# Altium PCB Main_Block.PcbDoc (part 2 of 3)
Units mil, origin at the board's own origin, x right, y up, seen from the top; angles counter-clockwise.
Board outline 1101.34 x 1573.78 mil, 8 copper layers (Top Layer - Signal, L2 - GND, L3-Signal, Layer 3 - Signal, L5 PWR, L6-Signal, L7-GND, Bottom Layer - Signal), stack 62.48 mil thick; 156 components, 137 nets, 799 pads, 431 vias.
Unrouted connection lines stored in the file: 382.
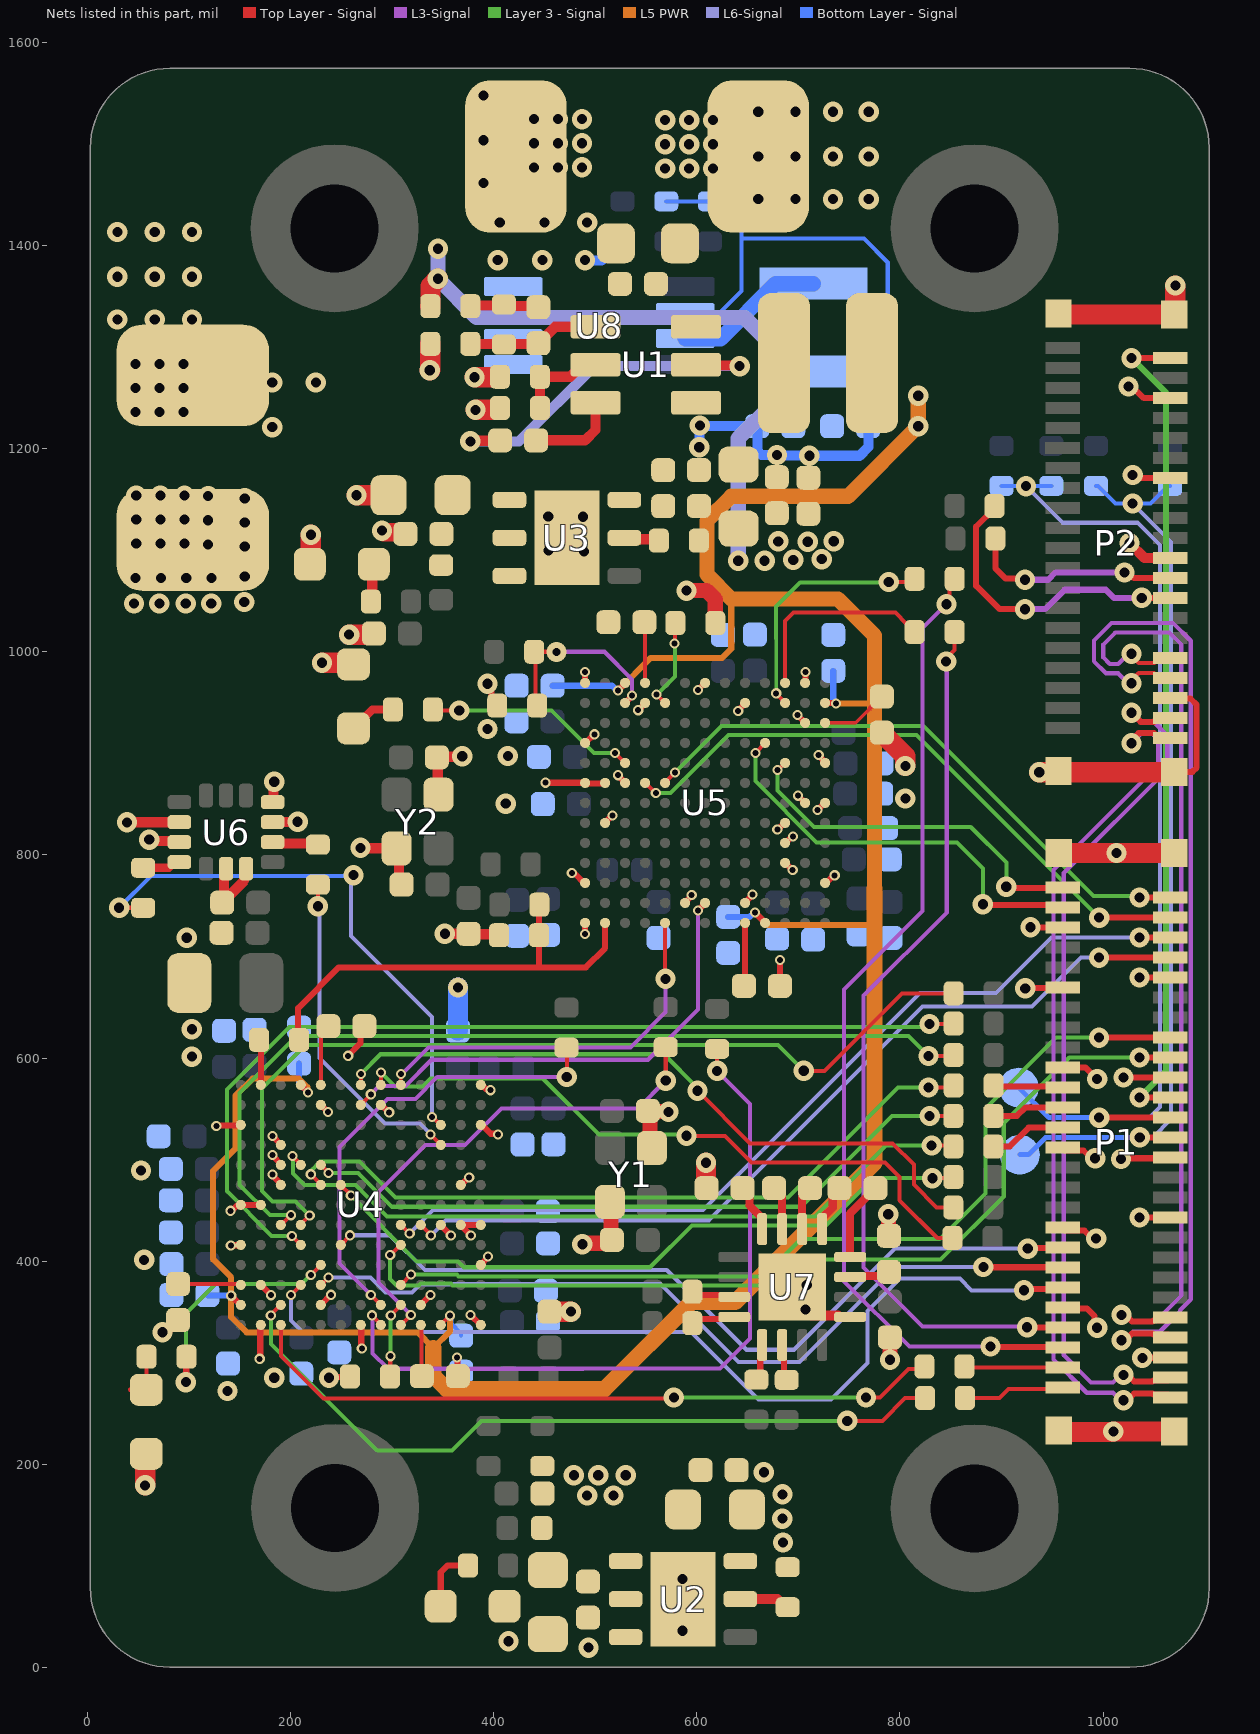
[diagram p8: the nets of this part, all layers, seen from the top]

## Via types
v1: diameter 20, hole 10, Top Layer - Signal to Bottom Layer - Signal, tented both sides, 285 vias
v2: diameter 10, hole 5.91, Top Layer - Signal to Bottom Layer - Signal, tented both sides, 145 vias
v3: diameter 19.68, hole 7.87, Top Layer - Signal to Bottom Layer - Signal, tented both sides, 1 vias

## Nets (pads, with @x,y where several pads share a name; then routed paths per layer and width w, separated by ;. In a path a pad name is that pad's centre, name@x,y a point inside that pad or via, vN(x,y) a via of type N, cw(c..) or ccw(c..) an arc to the next point about the centre after c; other vN are vias at no path point)
1V8: C21.1 C31.1 C38.1 C48.1 C62.1 C65.1 C78.2 C79.2 L2.2 R49.2 R50.2 U4.A3 U4.B13 U4.N10 U5.A3 U5.B13 U5.N10 U8.6 | length 3257.4
  Top Layer - Signal w4: U4.A3@347.4,336.68 v2(357.24,346.53)
  Top Layer - Signal w6: v2(141.77,366.16) U4.B13@151.62,356.31 ; U4.N10@210.3,573.68 210.3,573.55 217.49,566.37 v2(217.49,566.24) ; v2(522.53,961.81) 522.53,962.08 529.54,969.1 U5.A3@529.54,969.37 ; v2(657.5,743.29) 657.5,742.99 U5.N10@667.34,733.15 ; U5.B13@726.4,949.68 726.68,949.4 736.9,949.4 v2(737.19,949.11)
  L5 PWR w6: v2(217.49,566.24) 216.72,567.01 216.72,571.4 208.31,579.81 162.81,579.81 146,563 146,511 124,489 124,402 141.77,384.23 v2(141.77,366.16) 141.77,345.23 157,330 325.42,330 340.71,314.71 357.24,331.24 v2(357.24,346.53) ; v2(522.53,961.81) 554.72,994 625,994 634,1003 634,1052 ; v2(657.5,743.29) 669.79,731 774.62,731 775,730.62 ; v2(737.19,949.11) 774.9,949.11 775,949
  L5 PWR w15: 775,767 775,949 775,1016 739,1052 634,1052 610,1076 610,1129 634,1153 749,1153 v1(818,1222) v1(818,1252)
  L5 PWR w16: 340.71,314.71 340.71,287.29 354,274 509,274 595,360 638,360 775,497 775,730.62 775,767
  Bottom Layer - Signal w4: v2(357.24,346.53) 358.39,345.38 358.39,338.61 368.19,328.81 C21.1@368.19,326.83 ; R50.2@570,1443.37 630.63,1443.37 644,1430 644,1406.57 ; U8.6@588.65,1333.8 588.85,1334 623,1334 644,1355 644,1406.57 ; 788,1287 788,1383 764.43,1406.57 644,1406.57
  Bottom Layer - Signal w6: C31.1@118.4,366.93 118.78,366.54 141.39,366.54 v2(141.77,366.16) ; C38.1@208.67,594.61 208.67,575.05 v2(217.49,566.24) ; C65.1@458.21,966.55 516.7,966.55 521.44,961.81 v2(522.53,961.81) ; C48.1@631,739 652.12,739 656.41,743.29 v2(657.5,743.29) ; C62.1@734.4,981.18 734.4,952.98 737.19,950.19 v2(737.19,949.11)
12V: C2.1 C3.1 pad.2@104,1110 pad.2@660.6,1487.48 R1.1 U1.3 | length 26
  Top Layer - Signal w20: v1(382.19,1238.11) R1.1@404.59,1238.11 ; R1.1@404.62,1238.14 406.28,1238.14 406.43,1238.3 R1.1@406.43,1239.95
  other v1: 46.09,1047.48 71.09,1047.48 97.09,1047.48 122.09,1047.48 154.69,1048.94 47.58,1072.48 72.58,1072.48 97.5,1072.48 122.5,1072.48 155.09,1073.94 155.09,1103.48 48.35,1106.48 72.09,1106.48 95.84,1106.48 119.09,1105.73 155.09,1127.23 119.09,1129.48 48.35,1130.09 72.09,1130.09 95.84,1130.09 155.09,1150.97 119.09,1153.23 48.35,1153.7 72.09,1153.7 95.84,1153.7 660.6,1445.48 697.35,1445.48 734.09,1445.48 769.35,1445.48 568.87,1475.73 592.48,1475.73 616.09,1475.73 660.6,1487.48 697.35,1487.48 734.09,1487.48 769.35,1487.48 568.87,1499.48 592.48,1499.48 616.09,1499.48 568.87,1523.23 592.48,1523.23 616.09,1523.23 660.6,1531.48 697.35,1531.48 734.09,1531.48 769.35,1531.48
+5V_SYS: C4.1 C5.1 C7.1 C8.1 C11.1 C12.1 C77.2 L1.2 R2.1 R6.2 R9.2 U2.6 U3.6 U8.2 U8.3 | length 639.9
  Top Layer - Signal w20: R2.1@337.82,1340.11 337.98,1340.27 337.98,1359.9 v1(345.19,1367.11)
  L6-Signal w15: v1(345.36,1396.64) 345.27,1396.56 345.27,1367.19 v1(345.19,1367.11) 383.3,1329 647,1329 672,1304 672,1241 640.79,1209.79 v1(640.79,1089.59)
  other v1: 684.89,123.28 684.25,146.76 684.38,170.69 666.06,192.35 666.84,1089.59 694.97,1090.42 722.99,1091.15 709.24,1108.2 680.29,1108.62 734.88,1108.82
AUX1: P1.27 R25.1 R52.1 TP1.TP | length 902.7
  Top Layer - Signal w6: v1(1036,522) 1036.08,521.92 1066.02,521.92 P1.27@1066.1,521.84
  L6-Signal w4: v1(1029,1146) 1067,1108 1067,540 1049,522 v1(1036,522)
  Bottom Layer - Signal w4: R52.1@993,1163.31 994.97,1163.31 1012.28,1146 v1(1029,1146) 1046.72,1146 1064.03,1163.31 R25.1@1066,1163.31
  Bottom Layer - Signal w5: TP1.TP@918,505 926.45,505 943.45,522 v1(1036,522)
AUX2: P1.29 R26.1 R53.1 TP2.TP | length 984
  Top Layer - Signal w6: v1@996.04,541.5 P1.29@1066.1,541.52
  L6-Signal w4: v1(924,1163) 960,1127 1034,1127 1056,1105 1056,552 1045.49,541.49 v1(996.02,541.49)
  Bottom Layer - Signal w4: R53.1@900,1163.31 900.16,1163.16 923.84,1163.16 v1(924,1163) 924.16,1163.16 948.84,1163.16 R26.1@949,1163.31
  Bottom Layer - Signal w5: TP2.TP@917,571 946.51,541.49 v1(996.02,541.49)
CAM_TRIGGER: P1.31 P2.39 | length 821.2
  Top Layer - Signal w6: v1(1028,1289) P2.39@1066,1289 ; v1(1035.72,561.2) P1.31@1066.1,561.21
  Layer 3 - Signal w6: v1(1028,1289) 1062,1255 1062,587.48 v1(1035.72,561.2)
Elbow_SCL_IMU1_H: P1.51 U5.F5 | length 590.8
  Top Layer - Signal w4: U5.F5@568.91,870.94 568.91,871.24 578.64,880.97 v2(578.64,881.26)
  Top Layer - Signal w6: v1(1035.72,758.06) P1.51@1066.1,758.07
  Layer 3 - Signal w4: v2(578.64,881.26) 624.44,927.07 770.28,927.07 823.23,927.07 990.72,759.58 1034.2,759.58 v1(1035.72,758.06)
Elbow_SCL_MAG_H: P1.47 U4.F5 | length 881.5
  Top Layer - Signal w4: U4.F5@308.73,435.89 308.88,435.89 317.33,427.44 v2(317.49,427.44)
  Top Layer - Signal w6: v1(1035.72,718.69) P1.47@1066.1,718.7
  L6-Signal w4: v2(317.49,427.44) 340.53,450.48 606.09,450.48 819.59,663.98 894.58,663.98 949.3,718.69 v1(1035.72,718.69)
Elbow_SDA_IMU1_H: P1.49 U5.F4 | length 619.1
  Top Layer - Signal w4: U5.F4@549.23,870.94 549.53,870.94 559.37,861.1 v2(559.67,861.1)
  Top Layer - Signal w6: v1(996.02,738.35) 996.06,738.39 P1.49@1066.1,738.39 P1.49@1066.1,738.39
  Layer 3 - Signal w4: v2(559.67,861.1) 574.18,861.1 631.15,918.07 770.28,918.07 816.3,918.07 v1(996.02,738.35)
Elbow_SDA_MAG_H: P1.45 U4.F4 | length 855.8
  Top Layer - Signal w4: U4.F4@328.41,435.89 328.41,435.59 338.25,425.74 v2(338.25,425.44)
  Top Layer - Signal w6: v1(995.98,698.94) 996.02,698.98 P1.45@1066.1,699.02 P1.45@1066.1,699.02
  L6-Signal w4: v2(338.25,425.44) 353.29,440.48 612,440.48 802.08,630.55 802.08,630.7 822.06,650.68 930.12,650.68 978.38,698.94 v1(995.98,698.94)
Elbow_TIM4_CH1: P1.28 R18.2 | length 76
  Top Layer - Signal w6: R18.2@891.88,513.11 908.19,513.11 926.76,531.68 P1.28@960.19,531.68
Elbow_TIM4_CH2: P1.30 R19.2 | length 71.7
  Top Layer - Signal w6: R19.2@891.88,543.11 915.19,543.11 923.45,551.37 P1.30@960.19,551.37
Elbow_TIM4_CH3: P1.32 R20.2 | length 68.9
  Top Layer - Signal w6: R20.2@892.19,573.11 893.22,572.08 959.16,572.08 P1.32@960.19,571.05
ETHE_RX_N: P1.9 P2.9 | length 943.9
  Top Layer - Signal w4.2: v1(1028,998) 1028,996 1035,989 1050.25,989 1054.98,993.72 P2.9@1066,993.72
  Top Layer - Signal w6: v1(1018.09,347.33) 1021.88,347.33 1028.38,340.83 1048.65,340.83 1049.59,341.77 1063.19,341.77 P1.9@1066.1,344.67
  L3-Signal w4.2: v1(1018.09,347.33) 1022.08,347.33 1028.46,340.95 1051.57,340.95 1077,366.39 1077,1007 1065,1019 1012.01,1019 1000.2,1007.19 1000.2,994.36 1006.56,988 1014.95,988 1024.95,998 v1(1028,998)
ETHE_RX_P: P1.7 P2.7 | length 1008
  Top Layer - Signal w4.2: v1(1028,969) 1028,972 1035,979 1050.02,979 1054.98,974.04 P2.7@1066,974.04
  Top Layer - Signal w6: v1(1018.09,322.33) 1021.88,322.33 1028.38,328.83 1048.65,328.83 1049.59,327.89 1063.19,327.89 P1.7@1066.1,324.99
  L3-Signal w4.2: v1(1018.09,322.33) 1020.87,322.33 1029.29,330.75 1055.79,330.75 1075.57,350.53 1075.57,351.94 1086.2,362.58 1086.2,1010.81 1068.81,1028.2 1008.2,1028.2 998,1018 997.94,1018 991,1011.06 991,990.55 1002.75,978.8 1014.75,978.8 1024.55,969 v1(1028,969)
ETHE_TX_N: P1.3 P2.3 | length 863.2
  Top Layer - Signal w6: v1(1020.09,288.28) 1023.88,288.28 1030.38,281.78 1048.65,281.78 1049.59,282.71 1063.19,282.71 P1.3@1066.1,285.62 ; v1(1028,940) 1037,931 1050,931 1050.76,931.76 1063.09,931.76 P2.3@1066,934.67
  L3-Signal w4.2: v1(1020.09,288.28) 1017.13,288.28 1009.73,280.88 988.12,280.88 961.29,307.71 961.29,782.22 1063.2,884.13 1063.2,917.74 1050.74,930.2 1037.8,930.2 v1(1028,940)
ETHE_TX_P: P1.1 P2.1 | length 868.5
  Top Layer - Signal w6: v1(1020.09,263.28) 1023.88,263.28 1030.38,269.78 1048.65,269.78 1049.59,268.84 1063.19,268.84 P1.1@1066.1,265.93 ; v1(1028,910) 1028,913 1035,920 1049.96,920 1054.98,914.98 P2.1@1066,914.98
  L3-Signal w4.2: v1(1020.09,263.28) 1017.13,263.28 1009.73,270.68 983.9,270.68 951.09,303.48 951.09,785.03 1054,887.94 1054,913.93 1046.93,921 1039,921 v1(1028,910)
GND: C2.2 C3.2 C4.2 C5.2 C7.2 C8.2 C9.2 C10.2 C11.2 C12.2 C13.2 C14.2 C15.2 C16.2 C17.2 C18.2 C19.1 C20.2 C21.2 C22.2 C23.2 C24.1 C25.2 C26.2 C27.2 C28.2 C29.2 C30.2 C31.2 C32.2 C33.2 C34.2 C35.2 C36.2 C37.2 C38.2 C39.2 C40.2 C41.2 C42.2 C43.1 C44.1 C45.1 C46.1 C47.2 C48.2 C49.2 C50.2 C51.1 C52.2 C53.2 C54.2 C55.2 C56.2 C57.2 C58.2 C59.2 C60.2 C61.2 C62.2 C63.2 C64.2 C65.2 C66.2 C67.2 C68.2 C69.2 C70.2 C71.2 C72.2 C75.2 C76.2 C77.1 C78.1 C79.1 D1.1 D2.1 D3.1 D4.1 P1.0 P1.5 P1.10 P1.18 P1.19 P1.25 P1.26 P1.33 P1.34 P1.42 P1.43 P1.48 P2.0 P2.5 P2.19 P2.27 P2.35 pad.2@104,1272 pad.2@422,1487.48 R3.2 R5.2 R10.1 R22.1 R40.1 R46.1 R48.1 R51.1 U1.1 U2.3 U2.7 U3.3 U3.7 U4.A1 U4.A7 U4.A12 U4.B4 U4.B9 U4.C12 U4.D1 U4.E13 U4.F1 U4.F2 U4.F3 U4.G12 U4.G13 U4.H2 U4.H11 U4.J11 U4.K11 U4.L1 U4.L13 U4.M6 U4.M9 U4.N1 U5.A1 U5.A7 U5.A12 U5.B4 U5.B9 U5.C12 U5.D1 U5.E13 U5.F1 U5.F2 U5.F3 U5.G12 U5.G13 U5.H2 U5.H11 U5.J11 U5.K11 U5.L1 U5.L13 U5.M6 U5.M9 U5.N1 U6.2 U6.3 U6.6 U6.7 U6.10 U6.11 U7.13 U7.17 U8.1 U8.4 Y1.2 Y1.4 Y2.2 Y2.4 | length 3256.2
  Top Layer - Signal w4: v2@182.56,503.89 v2(182.56,504.79) ; v2@182.56,523.08 v2(182.56,523.48) ; U4.J11@190.62,494.94 U4.J11@190.62,495.84 ; U4.K11@190.62,514.63 U4.K11@190.62,515.03 ; U4.M9@229.99,554 U4.M9@230.38,554 ; U4.A7@269.27,337.38 U4.A7@269.36,337.46 ; U4.F3@348.1,435.59 U4.F3@348.1,435.89 ; v2(357.94,425.44) v2@357.94,425.74 ; v2(377.21,347.13) v2@377.51,347.13 ; v2(377.62,425.44) v2@377.62,425.74 ; U4.A1@387.17,337.46 U4.A1@387.47,337.46 ; U5.H11@687.03,831.05 U5.H11@687.03,831.57
  Top Layer - Signal w6: v2(127.15,533.37) 127.62,533.84 150.77,533.84 U4.L13@151.25,534.31 ; v2(141.18,449.74) 142.26,449.74 147.33,454.81 150.23,454.81 150.99,455.57 U4.G12@170.93,455.57 ; v2(141.37,415.56) 141.69,415.88 150.93,415.88 U4.E13@151.25,416.2 ; v2(169.86,304.14) 170.39,304.68 170.39,336.93 U4.A12@170.93,337.46 ; U4.C12@170.93,376.83 v2(181.07,366.69) ; v2(182.56,485.39) 182.56,484.35 190.62,476.3 U4.H11@190.62,475.26 ; v2@182.56,503.89 U4.J11@190.62,495.84 ; v2@182.56,523.08 U4.K11@190.62,515.03 ; U4.B9@230.19,357.11 230.19,357.3 v2(240.03,367.1) v2(240.03,367.1) ; U4.M9@230.38,554 230.38,553.65 v2@237.12,546.91 ; v1(238.09,285.48) 238.66,286.04 258.24,286.04 R10.1@258.8,286.6 ; v2@256.95,602.61 268.87,614.53 268.87,627.54 C18.2@272.81,631.48 ; U4.A7@269.27,337.38 269.83,336.82 269.83,314.55 v2(270.31,314.08) ; U4.M6@289.62,553.11 290.45,553.11 296.82,546.74 v2(297.34,546.74) ; U4.B4@328.41,357.15 328.41,357.24 337.82,366.65 v2(337.82,366.75) ; U4.F3@348.1,435.59 v2@357.94,425.74 ; v2(364.09,305.48) 364.5,305.07 364.5,287.52 C16.2@364.91,287.11 ; U4.H2@367.78,475.26 368.23,475.26 375.62,482.66 v2(376.07,482.66) ; v2@376.09,482.48 v2(376.07,482.66) ; v2@377.51,347.13 U4.A1@387.17,337.46 ; v2@377.62,425.74 367.78,435.59 368.08,435.89 U4.F1@387.47,435.89 ; U4.L1@387.47,534.31 388.55,534.31 397.28,525.58 403.6,525.58 v2(404.36,524.81) ; U4.N1@387.47,573.68 388.55,573.68 392.99,569.25 396.33,569.25 v2(397.09,568.48) ; U4.D1@387.71,395.93 387.71,397.32 394.52,404.13 v2(394.52,404.69) ; v1(394.09,968.48) 394.09,964.69 397.97,960.81 397.97,952.66 R46.1@403.63,947 ; v2(451.19,871.11) 451.27,871.03 490.09,871.03 U5.F1@490.17,870.94 490.81,870.31 509.23,870.31 U5.F2@509.86,870.94 ; C24.1@455.19,350.54 455.25,350.48 C24.1@463.47,350.48 ; v2(477.03,782.18) 477.79,781.42 480.19,781.42 488.87,772.74 U5.L1@490.19,772.74 ; U5.D1@489.54,910.31 490.53,910.31 498.97,918.75 v2(499.32,918.75) ; v2(490.19,722.11) U5.N1@490.17,733.15 ; U5.A1@490.17,969.37 v2(490.19,980.11) ; U5.H2@509.6,831.57 v2(517.01,838.99) ; v2(522.38,878.46) 522.38,878.28 529.54,871.12 U5.F3@529.54,870.94 ; v2(542.37,942.43) 542.37,942.62 549.23,949.49 U5.B4@549.23,949.68 ; U5.M6@588.53,752.87 588.53,753.45 595.07,759.99 v2(595.07,760.67) ; v2(601.1,962.48) 601.24,962.48 608.14,969.37 U5.A7@608.28,969.37 ; v2(640.81,941.63) 640.81,942.23 647.65,949.08 U5.B9@647.65,949.68 ; U5.M9@647.02,752.83 647.14,752.83 654.94,760.63 v2(654.94,761.15) ; v2(679.29,825.03) 679.88,825.03 685.9,831.05 U5.H11@687.03,831.05 ; C45.1@681.91,671.11 681.91,696.29 v2(682.09,696.48) ; U5.K11@687.03,792.2 687.17,792.2 694.33,785.05 v2(694.47,785.05) ; U5.J11@687.03,811.89 687.72,811.89 694.13,818.29 v2(694.83,818.29) ; v2(699.19,937.72) 699.19,937.62 706.71,930.1 U5.C12@706.71,930 ; v2@699.57,858.35 U5.G12@706.71,851.26 ; U5.A12@706.71,969.37 706.95,969.61 706.95,979.87 v2(707.19,980.11) ; v2(718.91,844.41) 719.23,844.41 726.07,851.26 U5.G13@726.4,851.26 ; v2(720.08,898.38) 720.08,897.66 726.4,891.35 U5.E13@726.4,890.63 ; U5.L13@726.66,771.87 726.73,771.87 734.86,780 v2(735.84,780) ; v1(923.3,668.65) 923.72,669.07 959.77,669.07 P1.42@960.19,669.49 ; v1(928.55,728.91) 928.74,728.73 960.01,728.73 P1.48@960.19,728.55 ; P1.10@960.19,354.52 961.23,353.48 984.19,353.48 991.43,346.24 991.43,337.3 v1(994.11,334.62) ; P1.18@960.19,433.26 963.1,430.35 981.44,430.35 989.31,422.48 v1(993.09,422.48) ; P1.26@960.19,512 963.1,509.09 980.7,509.09 988.31,501.48 v1(992.09,501.48) ; P1.34@960.19,590.74 982.84,590.74 v1(994.09,579.48) ; v1(1017.51,500.77) 1018.2,501.46 1065.4,501.46 P1.25@1066.1,502.15 ; v1(1019.96,580.91) P1.33@1066.1,580.89 ; v1(1025,1261) 1028.7,1261 1040.07,1249.63 P2.35@1066,1249.63 ; v1(1029,1174) 1032.79,1174 1035.9,1170.89 P2.27@1066,1170.89 ; v1(1035.72,443.09) P1.19@1066.1,443.1 ; v1(1035.72,679.32) P1.43@1066.1,679.33 ; v1(1038.65,305.03) 1038.78,305.17 1065.96,305.17 P1.5@1066.1,305.3 ; P2.5@1066,954.35 1066.35,954 1086,954 1092,948 1092,886 1087.83,881.83 P2.0@1070.09,881.83 P2.0@1069.75,881.48
  Top Layer - Signal w10: v1(39.19,832.11) 39.31,832.23 90.72,832.23 U6.2@90.84,832.35 ; v1(61.19,815.11) 62.41,813.89 89.62,813.89 U6.3@90.84,812.66 ; v1(74.16,330.29) 76.08,332.2 79.05,332.2 89.11,342.27 C17.2@89.6,342.27 ; C76.2@132.95,753.15 C76.2@134.83,755.03 ; U6.6@136.71,786.48 134.83,784.6 C76.2@134.83,755.03 ; U6.7@156.4,786.48 154.51,784.59 154.51,774.7 C76.2@134.83,755.03 ; U6.10@182.58,832.35 182.73,832.51 207.03,832.51 v1(207.19,832.66) ; U6.11@182.58,852.03 183.38,852.84 183.38,871.3 v1(184.19,872.11) ; v1(269.09,806.98) 269.42,806.64 304.28,806.64 307.09,803.83 307.09,773.36 C68.2@309.57,770.88 ; Y2.2@345.95,859.46 345.07,860.34 345.07,895.23 C54.2@344.19,896.11 344.69,896.61 368.69,896.61 v1(369.19,897.11) ; v1@352.13,722.45 C51.1@375.43,722.45 ; C51.1@375.47,722.41 375.93,721.95 400.94,721.95 R40.1@401.41,721.48 ; v1(708.26,376.77) 706.9,375.41 v1(706.9,352.55) 712.79,346.65 738.81,346.65 740.27,345.19 U7.13@750.94,345.19 ; v1(1026,1107) 1040.85,1092.15 P2.19@1066,1092.15
  Top Layer - Signal w15: v1(487.44,416.8) 488.4,417.75 512.16,417.75 515.5,421.09 515.5,457.56 Y1.2@514.52,458.53 ; C41.2@551.91,548.11 C41.2@552.41,547.61 ; Y1.4@555.86,511.68 553.88,513.66 553.88,546.13 C41.2@552.41,547.61 ; v1(572.19,547.11) 571.69,547.61 C41.2@552.41,547.61 ; v1(589.98,1060.17) 609.52,1060.17 618.31,1051.38 R22.1@618.31,1028.23 ; v1(788.46,446.38) 788.85,446 788.85,425.58 C71.2@789.23,425.2 ; v1(790.19,303.11) C72.2@790.15,325.13
  Top Layer - Signal w18: v1(290.2,1119.25) 291.83,1117.63 311.66,1117.63 C13.2@313.28,1116
  Top Layer - Signal w20: v1(57.09,179.48) 57.09,209.52 D3.1@58.19,210.62 ; D2.1@219.15,1086.18 220.19,1087.23 v1(220.19,1115.11) ; v1(231.19,989.11) 260.68,989.11 D4.1@262.19,987.6 ; v1(257.89,1016.84) 281.11,1016.84 C57.2@282.24,1017.97 ; v1(265.19,1154.11) C14.2@296.69,1154.11 ; v1(337.19,1277.11) 337.66,1277.58 337.66,1302.95 R5.2@337.82,1303.11 ; v1(381.19,1270.11) 406.1,1270.11 406.25,1270.27 R3.2@406.25,1270.66 ; C24.1@463.47,350.48 v1(476.09,350.48) ; v1(609.19,497.11) 609.19,472.68 C75.2@609.76,472.11 ; C44.1@782.19,920.39 805.33,897.25 v1(805.33,887.48) ; v1(937.09,881.48) P2.0@1069.75,881.48 ; P2.0@956.09,1332.83 956.92,1332 P2.0@1070,1332 1071.09,1333.09 v1(1071.09,1360.48) ; P1.0@956.19,801.89 v1(1013.14,801.89) P1.0@1070.1,801.89 ; P1.0@957.58,232.06 1009.68,232.06 v1(1010.09,232.48) 1069.89,232.48 P1.0@1070.19,232.78
  Bottom Layer - Signal w10: v1(490.09,1385.48) 490.57,1385 506.03,1385 525.03,1404 R51.1@527,1404 ; v1(602.53,1201.32) 602.8,1201.59 602.8,1222.34 v1(603.07,1222.61) 603.38,1222.3 659.26,1222.3 C78.1@659.57,1222 ; C78.1@659.94,1221.62 659.94,1197.43 663.71,1193.67 v1(679.03,1193.67) ; v1@678.88,1193.44 v1@679.03,1193.29 ; v1@679.4,1193.67 679.78,1193.29 v1@710.88,1193.29 ; v1(710.88,1192.92) 760.29,1192.92 769.09,1201.72 C79.1@769.09,1221.62
  Bottom Layer - Signal w20: C28.2@364.84,627.17 364.97,627.3 364.97,669.35 v1(365.09,669.48)
  other v1: 493.46,19.81 414.67,26.01 586.09,36.48 586.09,87.48 492.09,169.48 518.09,169.48 479.09,189.48 503.09,189.48 530.09,189.48 138.09,272.48 184.09,285.48 56.09,401.48 53.09,489.48 103.09,601.48 103.09,628.48 98.09,718.48 352.09,722.48 412.09,850.48 805.33,855.48 414.09,897.48 394.12,924.06 489.11,1098.71 454.11,1099.64 453.8,1133.24 488.17,1132.93 182.25,1221.09 47.5,1236.09 71.25,1236.09 95,1236.09 47.5,1259.7 71.25,1259.7 95,1259.7 182.25,1265.09 225.09,1265.09 47.5,1283.31 71.25,1283.31 95,1283.31 29.76,1327.09 66.5,1327.09 103.25,1327.09 29.76,1369.09 66.5,1369.09 103.25,1369.09 404.09,1385.48 448.09,1385.48 29.76,1413.09 66.5,1413.09 103.25,1413.09 406.09,1422.48 450.09,1422.48 492.09,1422.48 390.09,1461.48 439.87,1476.73 463.48,1476.73 487.09,1476.73 439.87,1500.48 463.48,1500.48 487.09,1500.48 390.09,1503.48 439.87,1524.23 463.48,1524.23 487.09,1524.23 390.09,1547.48
  other v2: 237.17,546.91 256.95,602.35 699.52,858.35
GPIO_DR: R38.1 R39.1 R40.2 U5.N2 | length 444.7
  Top Layer - Signal w6: R38.1@208.69,618 207.58,619.11 207.58,649.21 247.62,689.26 444.69,689.26 ; R39.1@444.69,750.69 444.69,689.26 ; U5.N2@509.86,733.15 509.86,708.32 490.79,689.26 444.69,689.26
I2C1_SCL: P1.35 U4.E5 | length 945.1
  Top Layer - Signal w4: v2(298.28,406.36) 298.58,406.36 308.42,416.2 U4.E5@308.73,416.2
  Top Layer - Signal w6: v1(1035.72,600.57) P1.35@1066.1,600.58
  Layer 3 - Signal w4: v2(298.28,406.36) 298.28,382.72 304.58,376.42 326.39,376.42 327.98,378 358,378 359.81,376.19 672.81,376.19 698.57,401.96 840.1,401.96 902.19,464.05 902.19,536.11 966.65,600.57 v1(1035.72,600.57)
I2C1_SDA: P1.37 U4.C5 | length 908.5
  Top Layer - Signal w4: U4.C5@308.73,376.83 308.78,376.83 v2(318.92,386.92) v2(318.92,386.92)
  Top Layer - Signal w6: v1(995.98,620.19) v1(995.98,620.19) 1066.06,620.23 P1.37@1066.1,620.26
  Layer 3 - Signal w4: v2(318.92,386.92) 363.89,386.92 365.62,385.19 665.81,385.19 702.74,422.13 839.21,422.13 884.04,466.96 884.04,550.4 953.82,620.19 v1(995.98,620.19)
I2C3_SCL: P1.50 U5.D10 | length 416.2
  Top Layer - Signal w4: v2(657.8,900.18) 657.8,900.48 667.34,910.02 U5.D10@667.34,910.31
  Top Layer - Signal w6: v1(881.63,751.53) 882.45,750.7 957.72,750.7 P1.50@960.19,748.23
  Layer 3 - Signal w4: v2(657.8,900.18) 657.8,872.63 718.09,812.34 770.28,812.34 856.11,812.34 881.63,786.83 v1(881.63,751.53)
I2C3_SDA: P1.52 U5.E11 | length 365.1
  Top Layer - Signal w4: v2(679.66,883.71) 679.88,883.71 686.8,890.63 U5.E11@687.03,890.63
  Top Layer - Signal w6: v1(904.7,768.7) 906.07,767.33 959.6,767.33 P1.52@960.19,767.92
  Layer 3 - Signal w4: v2(679.66,883.71) 679.66,863.37 715.45,827.57 770.28,827.57 869.71,827.57 904.7,792.58 v1(904.7,768.7)
I2C4_SCL: U4.N5 U5.N5 | length 384.4
  Top Layer - Signal w3.5: U4.N5@308.73,573.68 308.77,573.73 308.77,584.36 v2(308.81,584.4)
  Top Layer - Signal w4: U5.N5@568.91,733.15 568.91,689.26 568.91,678.34 v1(569.24,678.02)
  L3-Signal w4: v2(308.81,584.4) 309.96,584.4 336.18,610.62 463.47,610.62 534.65,610.62 569.24,645.21 v1(569.24,678.02)
I2C4_SDA: U4.M7 U5.M7 | length 477.5
  Top Layer - Signal w4: U4.M7@270.14,555.08 279.2,564.14 v2(279.2,564.44)
  Top Layer - Signal w6: v2(601.36,745.43) U5.M7@608.44,752.52
  L3-Signal w4: v2(279.2,564.44) 287.48,572.72 313.36,572.72 339.08,598.44 463.47,598.44 552.05,598.44 601.36,647.74 601.36,689.26 v2(601.36,745.43)
IMU1_INT1: R24.2 U4.L3 | length 552.5
  Top Layer - Signal w4: v1(31.5,748.03) R24.2@55.12,748.03 ; v2(339.56,541.93) 340.02,541.93 348.44,533.51 U4.L3@348.6,533.51
  L6-Signal w4: v1(262.19,780.11) 259.65,777.57 259.65,720.32 339.56,640.41 339.56,607 v2(339.56,541.93)
  Bottom Layer - Signal w4: v1(31.5,748.03) 62.69,779.22 261.3,779.22 v1(262.19,780.11)
IMU1_INT2_FSYNC: R23.1 U4.K3 | length 326.2
  Top Layer - Signal w4: v1(227.09,749.48) R23.1@227.09,770.8 ; v2(338.1,524.92) 338.1,524.77 347.8,515.08 U4.K3@347.8,514.86
  L6-Signal w4: v1(227.09,749.48) 228.66,747.91 228.66,600.13 293.22,535.57 327.75,535.57 338.1,525.22 v2(338.1,524.92)
MCU1_Main_SWCLK: P1.4 R44.1 | length 97.2
  Top Layer - Signal w4: R44.1@863.78,293.48 865.76,295.46 P1.4@960.19,295.46
MCU1_Main_SWDIO: P1.2 R43.1 | length 100.4
  Top Layer - Signal w4: R43.1@864.09,265.48 898.09,265.48 906.8,274.18 958.6,274.18 P1.2@960.19,275.78
MCU2_Main_SWCLK: P1.8 R32.1 | length 883.8
  Top Layer - Signal w4: v1(845.47,990.43) 845.47,993.23 853.88,1001.64 R32.1@853.88,1019.45
  Top Layer - Signal w6: v1(925.19,335.11) 925.33,334.97 960.05,334.97 P1.8@960.19,334.83
  L3-Signal w4: v1(845.47,990.43) 846.09,989.81 846.09,743.48 764.09,661.48 764.09,393.97 822.17,335.9 924.4,335.9 v1(925.19,335.11)
MCU2_Main_SWDIO: P1.6 R31.1 | length 978.7
  Top Layer - Signal w4: v1(845.88,1046.81) 848.95,1049.87 848.95,1066.87 R31.1@853.88,1071.81
  Top Layer - Signal w6: v1(889.19,316.11) 889.67,315.63 959.71,315.63 P1.6@960.19,315.15
  L3-Signal w4: v1(845.88,1046.81) 822.33,1023.26 822.33,744.72 745.09,667.48 745.09,380.29 809.28,316.11 v1(889.19,316.11)
NetC1_1: C1.1 U1.6 | length 89.5
  Top Layer - Signal w10: C1.1@441.91,1208.11 490.19,1208.11 500.37,1218.29 U1.6@500.37,1245.11
NetC1_2: C1.2 L1.1 U1.2 | length 368.9
  Top Layer - Signal w10: v1(377.19,1207.11) 377.69,1207.61 405.97,1207.61 C1.2@406.47,1208.11 ; U1.2@599.19,1282.51 599.89,1281.81 641.49,1281.81 v1(642.19,1281.11)
  L6-Signal w10: v1(377.19,1207.11) 425.11,1207.11 499.11,1281.11 v1(642.19,1281.11)
NetC6_1: C6.1 R4.2 R5.1 U1.4 | length 130.7
  Top Layer - Signal w10: R5.1@377.19,1303.11 377.53,1302.77 409.85,1302.77 R4.2@410.19,1302.42 410.82,1303.05 443.56,1303.05 C6.1@444.19,1303.68 444.53,1303.68 460.77,1319.91 U1.4@500.37,1319.91
NetC6_2: C6.2 R2.2 R4.1 | length 68.8
  Top Layer - Signal w10: R2.2@377.19,1340.11 378.03,1340.95 409.35,1340.95 R4.1@410.19,1341.79 411.53,1340.45 442.85,1340.45 C6.2@444.19,1339.11
NetC9_1: C9.1 C10.1 FB3.1 U2.1 U2.2
NetC13_1: C13.1 C14.1 FB4.1 U3.1 U3.2
NetC16_1: C16.1 U4.A4 | length 50.8
  Top Layer - Signal w4: U4.A4@328.41,337.46 328.94,336.93 328.94,287.64 C16.1@329.47,287.11
NetC17_1: C17.1 U4.C13 | length 62
  Top Layer - Signal w4: C17.1@89.6,377.7 107.36,377.7 150.38,377.7 U4.C13@151.25,376.83
NetC18_1: C18.1 U4.N9 | length 60.9
  Top Layer - Signal w4: U4.N9@229.99,573.68 229.99,624.09 C18.1@237.38,631.48
NetC43_2: C43.2 U5.A4 | length 60
  Top Layer - Signal w4: C43.2@548.49,1029.05 549.23,1028.31 U5.A4@549.23,969.37 ; C43.2@554.91,1029.05 C43.2@554.91,1029.11
NetC44_2: C44.2 U5.C13 | length 66.5
  Top Layer - Signal w3.5: U5.C13@726.4,930 756.36,930 770.28,943.92
  Top Layer - Signal w4: 770.28,943.92 C44.2@782.19,955.83
NetC45_2: C45.2 U5.N9 | length 62.5
  Top Layer - Signal w6: C45.2@646.47,671.11 647.65,672.29 U5.N9@647.65,733.15
NetC71_1: C71.1 U7.15 | length 41.4
  Top Layer - Signal w8: U7.15@750.94,384.57 751.86,385.49 C71.1@786.01,385.49 ; C71.1@790.05,384.86 C71.1@794.23,389.05
NetC73_1: C73.1 U7.16 | length 78.2
  Top Layer - Signal w8: U7.16@750.94,404.26 750.94,447.14 C73.1@775.91,472.11
NetC73_2: C73.2 U7.1 | length 47.4
  Top Layer - Signal w8: U7.1@723.47,431.72 723.47,442.55 733.84,452.92 733.84,465.47 C73.2@740.47,472.11
NetC74_1: C74.1 U7.2 | length 43.6
  Top Layer - Signal w8: U7.2@703.78,431.72 703.78,463.24 711.62,471.08 C74.1@711.62,472.11
NetC74_2: C74.2 U7.3 | length 43.7
  Top Layer - Signal w8: C74.2@676.19,472.11 676.19,471.08 684.09,463.17 U7.3@684.09,431.72
NetC75_1: C75.1 U7.4 | length 48.3
  Top Layer - Signal w8: C75.1@645.19,472.11 651.83,465.47 651.83,455.13 664.4,442.55 U7.4@664.4,431.72
NetD1_2: D1.2 R7.1 | length 63
  Top Layer - Signal w6: D1.2@348.01,60.55 348.01,94.01 354.55,100.55 R7.1@374.81,100.55
NetD2_2: D2.2 R8.1 | length 42.6
  Top Layer - Signal w10: R8.1@278.97,1051.31 R8.1@280.58,1052.92 ; R8.1@279.22,1049.37 280.67,1050.83 280.67,1084.73 D2.2@282.12,1086.18 ; D2.2@280.58,1086.5 D2.2@282.19,1088.11
NetD3_2: D3.2 R17.1 | length 55
  Top Layer - Signal w4: 42.05,273.6 42.25,273.79 D3.2@58.19,273.79 ; D3.2@58.51,267.31 R17.1@58.51,306.11
NetD4_2: D4.2 R29.1 | length 46.3
  Top Layer - Signal w8: D4.2@262.19,924.62 280.68,943.11 R29.1@300.82,943.11
NetL2_1: L2.1 U8.7 | length 148.9
  Bottom Layer - Signal w15: U8.7@588.65,1308.2 588.85,1308 623.29,1308 677.6,1362.31 L2.1@715,1362.31
NetP1_12: P1.12 U4.C10 | length 915.8
  Top Layer - Signal w4: v2(200.61,366.88) 200.61,367.01 210.3,376.7 U4.C10@210.3,376.83
  Top Layer - Signal w6: v1(922.09,371.53) 923.43,372.86 958.85,372.86 P1.12@960.19,374.2
  L6-Signal w4: v2(200.61,366.88) 200.61,341.97 212.09,330.48 594.35,330.48 660.83,264 732,264 768,300 768,351 800,383 859,383 870.47,371.53 v1(922.09,371.53)
NetP1_14: P1.14 U4.C9 | length 813.4
  Top Layer - Signal w4: U4.C9@229.99,376.83 230.06,376.83 237.34,384.11 v2(237.41,384.11)
  Top Layer - Signal w6: v1(882.09,394.48) 882.39,394.18 959.89,394.18 P1.14@960.19,393.89
  L6-Signal w4: v2(237.41,384.11) 279.05,384.11 293.82,369.34 319.93,369.34 328.08,377.49 564.51,377.49 641,301 701,301 794.48,394.48 v1(882.09,394.48)
NetP1_16: P1.16 U4.E8 | length 803
  Top Layer - Signal w4: U4.E8@249.67,416.2 249.67,416.33 258.88,425.54 v2(258.88,425.67) ; P1.16@960.15,413.53 P1.16@960.19,413.57
  Top Layer - Signal w6: v1(925.85,412.56) 926.36,413.07 959.69,413.07 P1.16@960.15,413.53
  L6-Signal w4: v2@258.88,425.58 v2(258.88,425.67) 298.33,425.67 332.5,391.5 570.5,391.5 649,313 695.77,313 795.33,412.56 v1(925.85,412.56)
NetP2_15: P2.15 R41.2 | length 297.8
  Top Layer - Signal w6: R41.2@893.15,1143.41 893.15,1141.45 875,1123.3 875,1065 898.1,1041.9 v1(923.02,1041.9) ; v1(1038,1053) 1038.11,1052.89 1065.89,1052.89 P2.15@1066,1052.78
  L3-Signal w6: v1(923.02,1041.9) 942.9,1041.9 962,1061 1002.61,1061 1010.61,1053 v1(1038,1053)
NetP2_17: P2.17 R42.2 | length 211.3
  Top Layer - Signal w6: R42.2@893.94,1111.48 893.94,1082.06 904.02,1071.98 921.94,1071.98 v1(923.02,1070.9) ; v1(1021,1078) 1024.79,1078 1030.32,1072.46 P2.17@1066,1072.46
  L3-Signal w6: v1(923.02,1070.9) 945.9,1070.9 953,1078 v1(1021,1078)
NetR1_2: R1.2 R3.1 U1.5 | length 90.4
  Top Layer - Signal w10: R1.2@445.8,1239.95 445.71,1240.04 445.71,1270.57 R3.1@445.62,1270.66 475.53,1270.66 487.38,1282.51 U1.5@500.37,1282.51
NetR6_1: R6.1 U2.5 | length 49.8
  Top Layer - Signal w10: U2.5@643,67.55 679.53,67.55 687.53,59.55 R6.1@689.5,59.55
NetR9_1: R9.1 U3.5 | length 35.1
  Top Layer - Signal w10: U3.5@528.69,1112.11 530.04,1110.76 561.35,1110.76 R9.1@562.7,1109.4
NetR10_2: R10.2 U4.B5 | length 74.8
  Top Layer - Signal w4: R10.2@298.17,286.6 298.33,286.76 298.33,306.44 v2(298.49,306.6) ; v2(298.88,346.7) 298.88,347 308.73,356.85 U4.B5@308.73,357.15
  Layer 3 - Signal w4: v2@298.81,306.68 298.68,306.8 298.68,346.5 v2(298.88,346.7)
NetR11_1: R11.1 U4.N6 | length 662
  Top Layer - Signal w4: U4.N6@289.04,573.68 v2(289.11,585.74) ; v1@590.11,523.45 627.85,523.45 653.97,497.33 785.5,497.33 799.7,483.13 799.7,460.13 836.72,423.11 R11.1@851.82,423.11
  Layer 3 - Signal w4: v2(289.11,585.74) 302.85,572 330,572 338.13,580.13 448.44,580.13 503.69,524.89 588.67,524.89 v1(589.87,523.69)
NetR12_1: R12.1 U4.N7 | length 677.4
  Top Layer - Signal w4: U4.N7@269.36,573.68 269.47,573.8 269.47,584.43 v2(269.58,584.55) ; v1(600.75,567.99) 652.63,516.11 792.89,516.11 813.83,495.17 813.83,475.47 836.19,453.11 R12.1@852.51,453.11
  Layer 3 - Signal w4: v2@269.58,584.6 288.83,603.85 463.47,603.85 567.58,603.85 600.75,570.68 v1(600.75,567.99)
NetR13_1: R13.1 U4.H8 | length 673.7
  Top Layer - Signal w4: U4.H8@249.35,475.28 259.51,465.11 v2(259.51,464.81) ; v1(831.93,481.86) 851.26,481.86 R13.1@852.51,483.11
  Layer 3 - Signal w4: v2(259.51,464.81) 324.33,400 365,400 370.81,394.19 554.08,394.19 595.24,435.35 727.43,435.35 773.94,481.86 v1(831.93,481.86)
NetR14_2: R14.2 U4.F11 | length 902.2
  Top Layer - Signal w4: U4.F11@190.84,435.6 v2(200.69,445.44) ; v1(828.19,602.11) 851.9,602.11 R14.2@852.9,603.11
  Layer 3 - Signal w4: v2(200.69,445.44) 179.81,445.44 149.99,475.27 149.99,565.8 201.76,617.57 206.03,621.85 808.45,621.85 v1(828.19,602.11)
NetR15_2: R15.2 U4.E10 | length 939.5
  Top Layer - Signal w4: v2(201.44,424.84) U4.E10@211.28,415 ; v1(829.1,633.68) 852.81,633.68 R15.2@853.81,634.68
  Layer 3 - Signal w4: v2(201.44,424.84) 201.14,425.15 181.53,425.15 137.65,469.02 137.65,569.17 186.05,617.57 199.33,630.85 826.27,630.85 v1(829.1,633.68)
NetR16_2: R16.2 U4.F10 | length 912.4
  Top Layer - Signal w4: U4.F10@209.25,435.2 v2(219.1,445.04) ; v1(705.39,587.55) 725.64,587.55 801.92,663.84 R16.2@852.9,663.84
  Layer 3 - Signal w4: v2(219.1,445.04) 205.3,458.84 182.46,458.84 172.06,469.24 172.06,569.98 214.93,612.85 463.47,612.85 680.09,612.85 v1(705.39,587.55)
NetR17_2: R17.2 U4.D9 | length 245.3
  Top Layer - Signal w4: v2(220.14,386.67) U4.D9@229.99,396.52
  Top Layer - Signal w6: v1(97.19,281.11) 97.53,281.45 97.53,305.77 R17.2@97.88,306.11
  Layer 3 - Signal w4: v1(97.19,281.11) 97.19,348.58 107.36,358.74 126.3,377.69 211.05,377.69 v2@220.04,386.67
NetR18_1: R18.1 U4.J10 | length 726.7
  Top Layer - Signal w4: v2(202.16,503.86) 202.16,503.48 210.3,495.33 U4.J10@210.3,494.94 ; v1(831.19,514.11) 851.51,514.11 R18.1@852.51,513.11
  Layer 3 - Signal w4: v2(202.16,503.86) 202.68,503.34 202.68,486.28 213.76,475.2 232.36,475.2 232.47,475.31 264.2,475.31 295.16,444.35 463.47,444.35 716.43,444.35 786.19,514.11 v1(831.19,514.11)
NetR19_1: R19.1 U4.J9 | length 676.7
  Top Layer - Signal w4: U4.J9@229.99,494.94 230.03,494.77 237.52,487.27 v2(237.52,487.13) ; v1(829.19,543.11) R19.1@852.51,543.11
  Layer 3 - Signal w4: v2(237.52,487.13) 266.83,487.13 300.23,453.73 463.47,453.73 702.81,453.73 792.19,543.11 v1(829.19,543.11)
NetR20_1: R20.1 U4.H9 | length 714.7
  Top Layer - Signal w4: v2(220.14,485.7) 220.14,485.4 230.09,475.46 U4.H9@230.09,475.25 ; v1(828.19,571.11) 850.82,571.11 R20.1@852.82,573.11
  Layer 3 - Signal w4: v2(220.14,485.7) 221.29,486.85 221.29,490.15 229.25,498.11 268.18,498.11 303.52,462.77 463.47,462.77 689.85,462.77 798.19,571.11 v1(828.19,571.11)
NetR22_2: R22.2 U5.B5 | length 90.7
  Top Layer - Signal w4: v2(560.34,958.09) 560.42,958.09 568.83,949.68 U5.B5@568.91,949.68 ; v2(578.19,1008.11) 578.56,1008.48 578.56,1027.86 R22.2@578.94,1028.23
  Layer 3 - Signal w4: v2(560.34,958.09) 561.02,958.09 578.69,975.76 578.69,1007.61 v2(578.19,1008.11)
NetR23_2: R23.2 U6.9 | length 45.6
  Top Layer - Signal w10: U6.9@182.58,812.66 183.83,811.41 225.85,811.41 R23.2@227.09,810.17
NetR24_1: R24.1 U6.4 | length 38
  Top Layer - Signal w8: R24.1@55.12,787.4 80.54,787.4 86.12,792.98 U6.4@90.84,792.98
NetR27_1: R27.1 U4.A6 | length 739.7
  Top Layer - Signal w4: v2(280.26,346.89) 280.26,346.57 289.04,337.79 U4.A6@289.04,337.46 ; v1(620.09,587.48) R27.1@620.09,609.11
  L3-Signal w4: v2(280.26,346.89) 280.81,346.35 280.81,309.43 295.93,294.31 487.97,294.31 488.01,294.36 622.96,294.36 652.59,323.98 652.59,554.99 v1(620.09,587.48)
NetR28_1: R28.1 U4.B6 | length 453.6
  Top Layer - Signal w4: v2(279.2,366.99) U4.B6@289.04,357.15 ; R28.1@471.81,610.32 472.1,610.03 v1(472.1,581.44)
  L3-Signal w4: v2(279.2,366.99) 248.38,397.81 248.38,512.76 295.57,559.95 323.11,559.95 344.59,581.44 463.47,581.44 v1(472.1,581.44)
NetR29_2: R29.2 U5.E3 | length 211
  Top Layer - Signal w4: R29.2@340.19,943.11 341.19,942.11 v1(366.19,942.11) ; v2(519.7,900.47) U5.E3@529.54,890.63
  Layer 3 - Signal w4: v1@366.32,942.24 427.4,942.24 457.06,942.24 498.83,900.47 v2(519.7,900.47)
NetR30_1: R30.1 U4.A5 | length 509.1
  Top Layer - Signal w4: U4.A5@308.73,337.46 v2(318.57,347.31) ; R30.1@569.39,610.78 569.5,610.66 v1(569.5,577.89)
  L3-Signal w4: v2(318.57,347.31) 286.7,379.18 286.7,468.08 333.04,514.42 371.8,514.42 408.04,550.65 542.27,550.65 v1(569.5,577.89)
NetR31_2: R31.2 U5.B11 | length 248.2
  Top Layer - Signal w4: v2@678.19,958.81 U5.B11@687.03,949.98 ; v1(789,1068.59) 811.29,1068.59 R31.2@814.51,1071.81
  Top Layer - Signal w6: v2@678.19,958.81 v2(678.19,959.11) ; U5.B11@687.03,949.68 U5.B11@687.03,949.98
  Layer 3 - Signal w3.5: v2(678.19,959.11) 678.19,1013.26
  Layer 3 - Signal w4: 678.19,1013.26 678.19,1044.58 701.87,1068.26 v1@791.21,1068.26
NetR32_2: R32.2 U5.A11 | length 200
  Top Layer - Signal w4: U5.A11@687.03,969.37 687.03,1030.41 695.09,1038.48 795.49,1038.48 806.51,1027.46 806.89,1027.46 814.51,1019.84 R32.2@814.51,1019.45
NetR34_2: R34.2 U7.9 | length 36.6
  Top Layer - Signal w6: R34.2@658.65,283.52 662.48,287.35 662.48,315.8 U7.9@664.4,317.72
NetR35_2: R35.2 U7.10 | length 36.2
  Top Layer - Signal w6: U7.10@684.09,317.72 686.01,315.8 686.01,285.91 R35.2@688.57,283.36
NetR36_2: R36.2 U7.8 | length 43.7
  Top Layer - Signal w6: R36.2@595.7,339.17 599.8,343.27 635.02,343.27 U7.8@636.94,345.19
NetR37_2: R37.2 U7.7 | length 43.4
  Top Layer - Signal w6: R37.2@595.7,370.16 599.05,366.8 635.02,366.8 U7.7@636.94,364.88
NetR38_2: R38.2 U4.N12 | length 45
  Top Layer - Signal w6: R38.2@169.32,618 170.93,616.38 U4.N12@170.93,573.68
NetR43_2: R43.2 U4.B11 | length 751
  Top Layer - Signal w4: v2(180.77,346.7) 180.77,347.53 U4.B11@190.35,357.11 ; v1(748.09,243.01) 782.65,243.01 805.12,265.48 R43.2@824.72,265.48
  Layer 3 - Signal w4: v2(180.77,346.7) 180.77,318.76 285.53,214 359,214 388.01,243.01 v1(748.09,243.01)
NetR44_2: R44.2 U4.A11 | length 694.5
  Top Layer - Signal w4: U4.A11@190.62,337.46 190.62,306.84 232.46,264.99 576.5,264.99 v1(577.48,265.97) ; v1(766.6,265.97) 780.26,265.98 808.32,294.04 821.66,294.04 R44.2@824.09,296.48
  Layer 3 - Signal w4: v1(577.48,265.97) v1(766.6,265.97)
NetR45_1: R45.1 R46.2 U5.B3 | length 187.9
  Top Layer - Signal w4: R46.2@443,947 441.5,948.5 441.5,998.5 R45.1@440,1000 v3(462,1000)
  Top Layer - Signal w6: U5.B3@529.54,949.68 529.54,949.88 536.41,956.74 v2(536.41,956.94)
  L3-Signal w4: v3(462,1000) 509.17,1000 536.41,972.77 v2(536.41,956.94)